# Altium PCB ClockPCB.PcbDoc
Units mm, origin at the board's own origin, x right, y up, seen from the top; angles counter-clockwise.
Board outline 99.98 x 86.26 mm, 2 copper layers (Top Layer, Bottom Layer); 22 components, 75 nets, 198 pads, 0 vias.
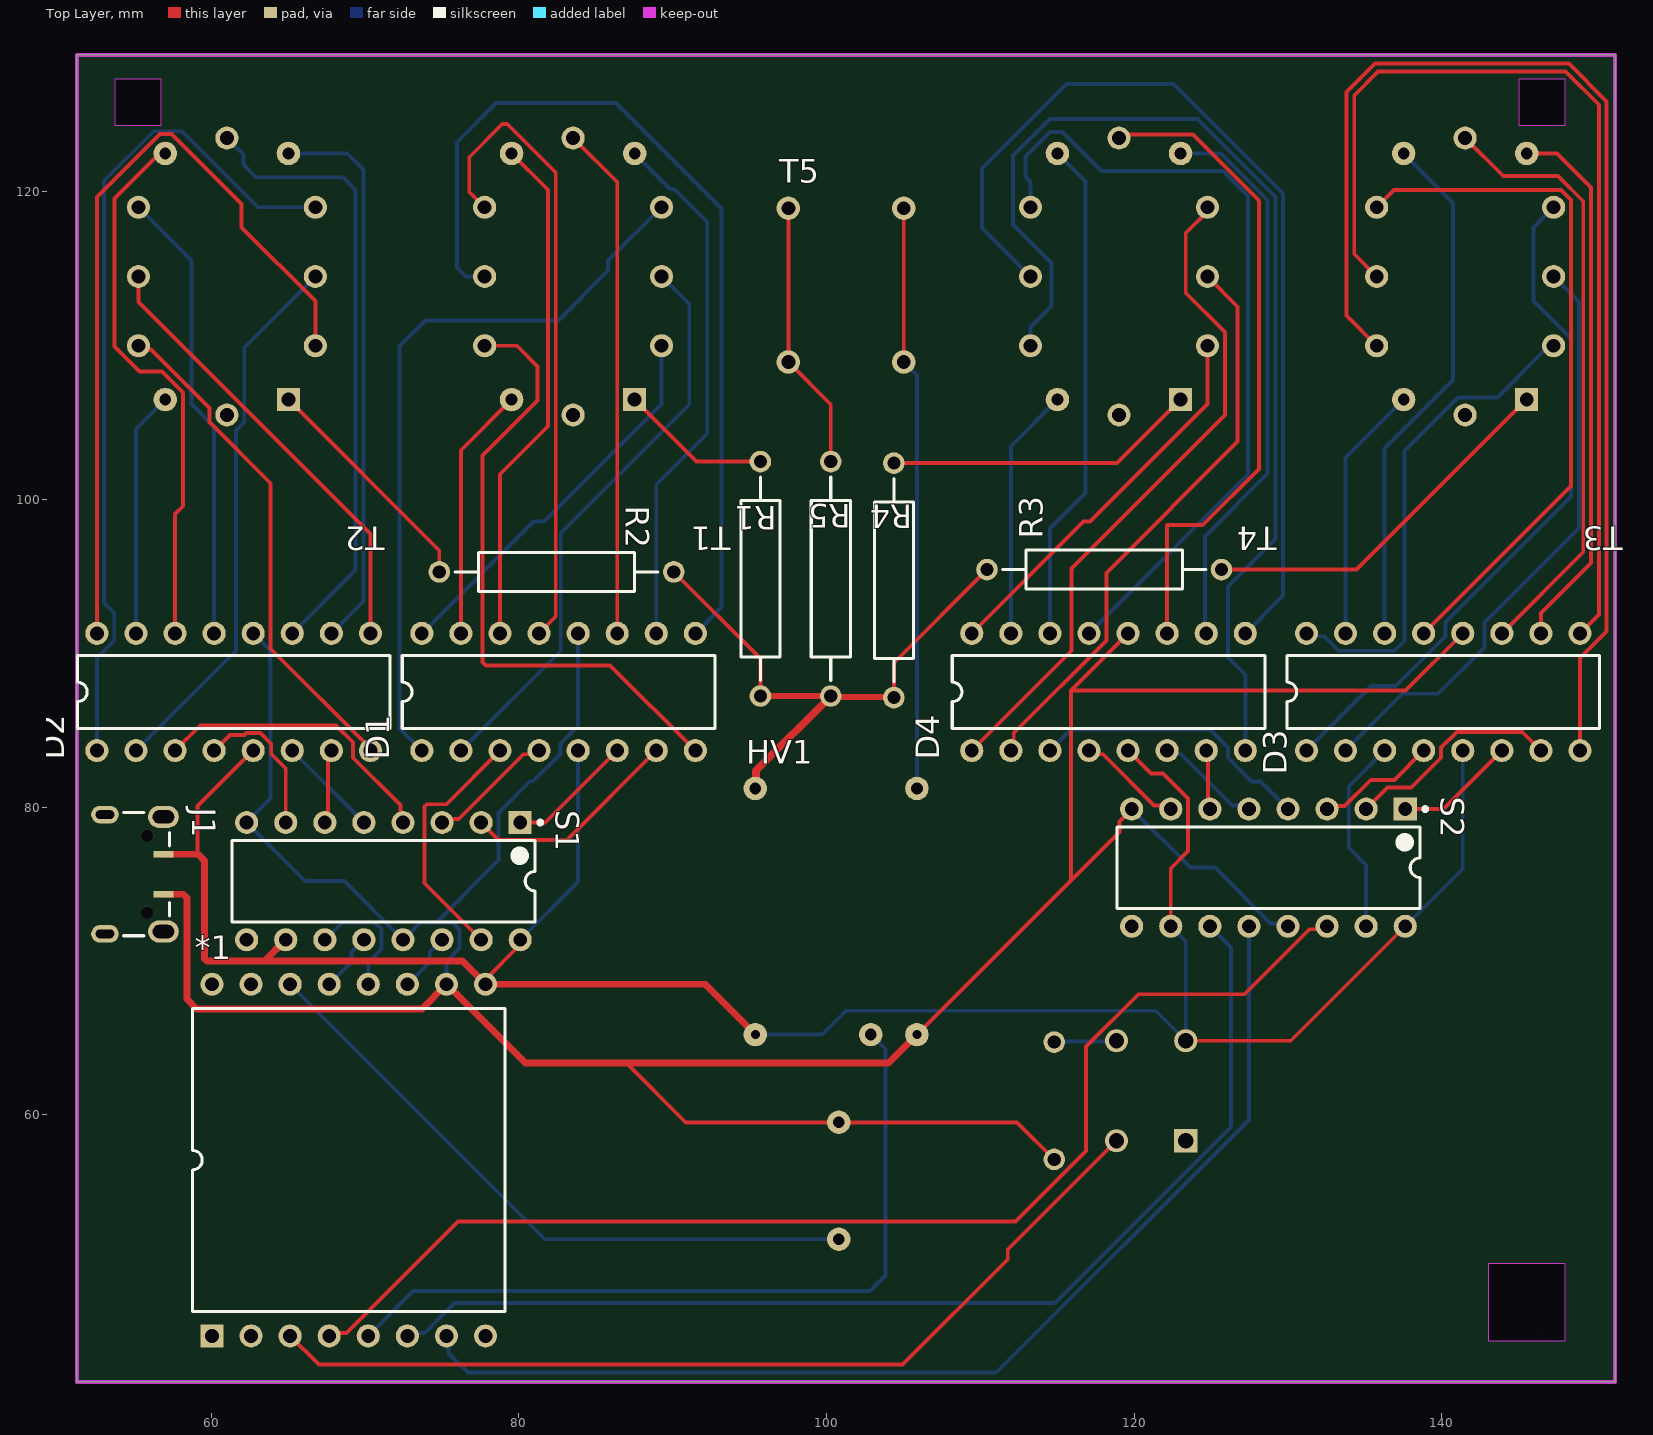
[diagram p0: Top Layer view]
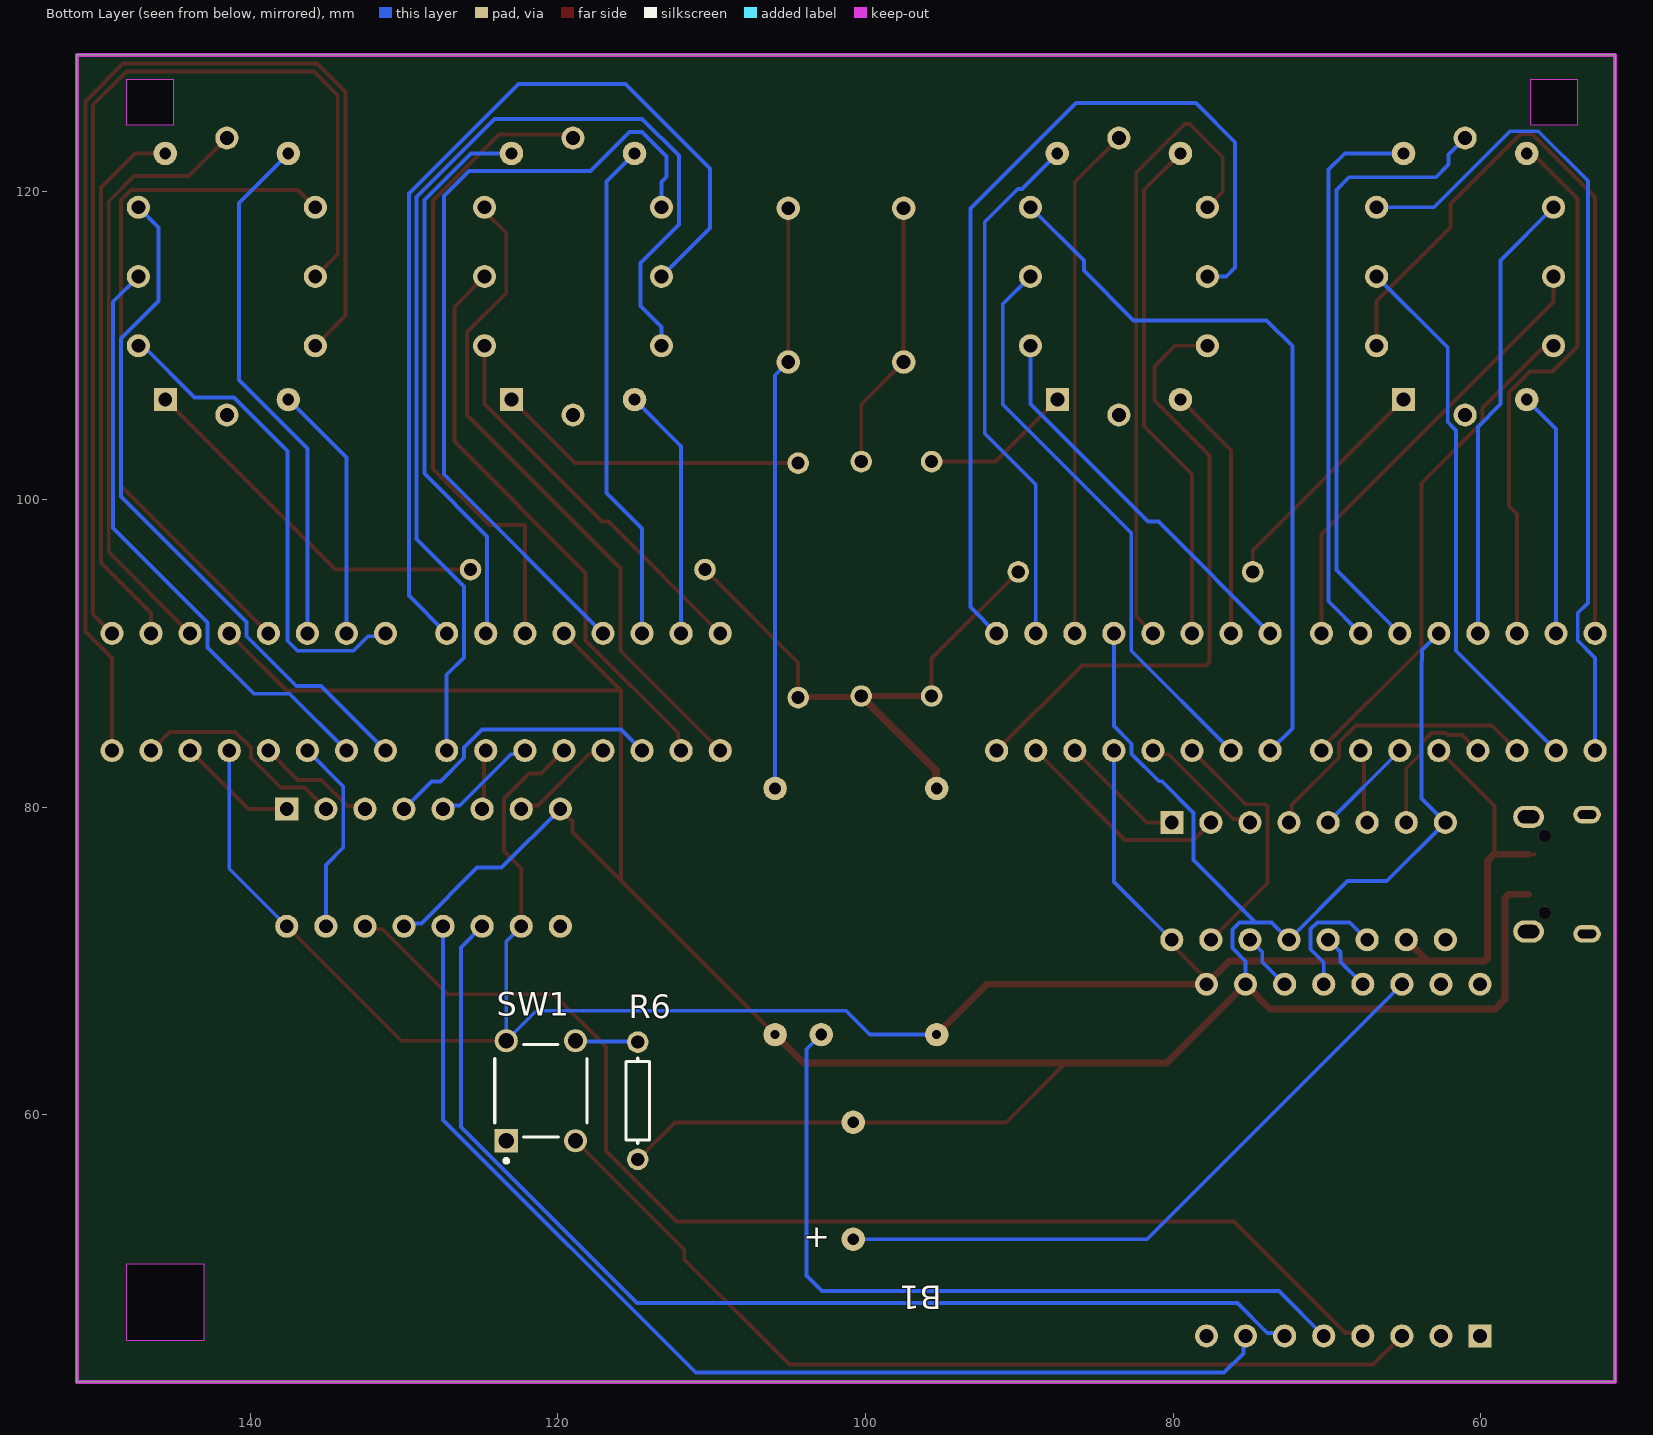
[diagram p1: Bottom Layer view, seen from below]
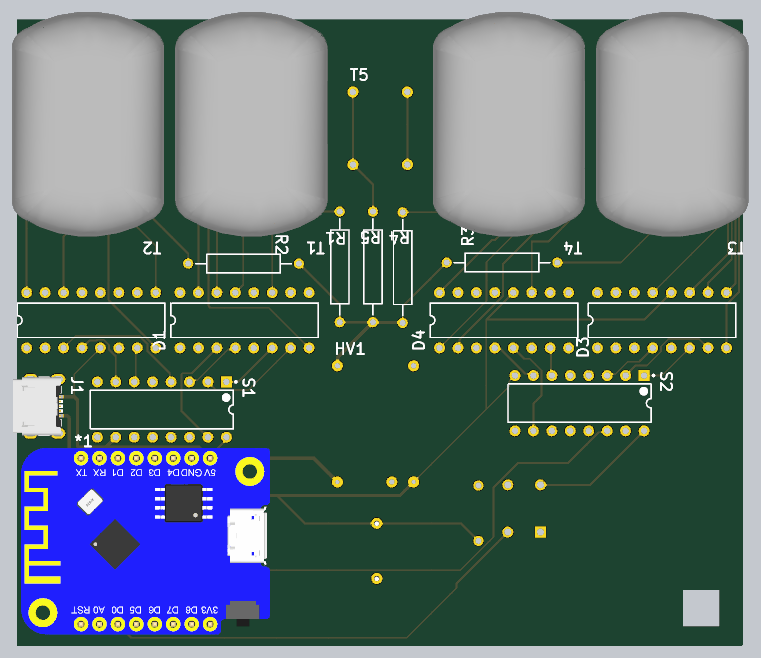
[diagram p2: 3D render of the assembled board from above, using the file's embedded part models]

## Layer stack, top to bottom
Top Solder: solder mask 0.0102, Solder Resist, Dk 3.5
Top Layer: signal copper 0.0356
Dielectric 1: dielectric 0.32, FR-4, Dk 4.8
Bottom Layer: signal copper 0.0356
Bottom Solder: solder mask 0.0102, Solder Resist, Dk 3.5

## Board outline
51.275,42.65 151.257,42.65 151.257,128.905 51.275,128.905
cut-out: 53.745,127.325 53.745,124.325 56.745,124.325 56.745,127.325
cut-out: 145,127.325 145,124.325 148,124.325 148,127.325
cut-out: 143,50.33 143,45.33 148,45.33 148,50.33
cut-out: 146.45,45.9
cut-out: 243.84,48.514

## Design rules (kind name [scope] priority, off if disabled: settings)
Clearance [All] p1: gap=0.254 ignorepadtopadclearanceinfootprint=TRUE except(0: Arc-Hole Track-Hole SMDPad-Hole THPad-Hole Via-Hole Fill-Hole Poly-Hole Region-Hole Text-Hole)
Height [All] p1: minheight=0 maxheight=100 prefheight=12.7
PolygonConnect [All] p1: connectstyle=Relief reliefconductorwidth=0.254 reliefentries=4 polygonreliefangle="90 Angle" airgapwidth=0.254
RoomDefinition Clock [InComponentClass('Clock')] p1: confinementstyle=ConfineIn formatcopy=TRUE lockcomponents=FALSE outline 48.375,42.6 152.35,42.6 152.35,130.492 48.375,130.492
RoutingVias [All] p1: holewidth=0.711 width=1.27 viastyle="Through Hole" minholewidth=0.711 minwidth=1.27 maxholewidth=0.711 maxwidth=1.27
SolderMaskExpansion [All] p1: expansion=0.102
Width [All] p1: maxlimit=0.5 minlimit=0.254 preferedwidth=0.254
29 further rules are at their usual default settings.

## Components (designator, comment, footprint, x,y, rotation, side; value= is the part's Value field where it differs from the comment)
*1 "D1Mini" DIP16-WemosD1Mini 60.055,45.64 r90 top
B1 "Buzzer" Buzzer 100.8,51.925 r0 bottom
D1 "K155ID1" DIP16 73.695,83.686 r90 top
D2 "K155ID1" DIP16 52.575,83.686 r90 top
D3 "K155ID1" DIP16 131.195,83.686 r90 top
D4 "K155ID1" DIP16 109.44,83.686 r90 top
HV1 "5V to 170V stepup" "5V to 170V stepup" 95.375,65.225 r90 top
J1 "629105150521" 629105150521 54,75.65 r270 top
R1 "Res2" AXIAL-0.6 95.7,94.85 r270 top value=18K
R2 "Res2" AXIAL-0.6 82.45,95.3 r0 top value=18K
R3 "Res2" AXIAL-0.6 118.05,95.45 r180 top value=18K
R4 "Res2" AXIAL-0.6 104.375,94.75 r270 top value=18K
R5 "Res2" AXIAL-0.6 100.275,94.85 r270 top value=18K
R6 "Res1" AXIAL-0.3 114.8,60.925 r90 bottom value=15K
S1 "SN74HC595N" N0016A 71.2,75.2 r270 top
S2 "SN74HC595N" N0016A 128.725,76.075 r270 top
SW1 "1825910-6" TECO-1825910-6_V 121.1,61.575 r90 bottom
T1 "IN-12A" IN-12A 89.279,110 r180 top
T2 "IN-12A" IN-12A 66.775,110 r180 top
T3 "IN-12A" IN-12A 147.26,110 r180 top
T4 "IN-12A" IN-12A 124.76,110 r180 top
T5 "NixieColon" "COLON IN-12A" 97.519,118.94 r0 top

## Footprints (in the part's own frame and the unit in brackets; to place one, negate y for a bottom-side part, rotate by r counter-clockwise, add the part's x,y. Pads: shape width x height; smd on the part's side, far side on the other; paste and mask are expansions set on the pad)
"5V to 170V stepup" [mil]
  round 60 hole 23.62: 5V+(0,0) 5V-(0,-413.39)
  round 60 hole 30: 170V(629.92,0) HVG(629.92,-413.39) SHDN(0,-295.28)
  body extent -49,-472 709,69, height 79
629105150521 [mm] "Micro USB 2.0 SMT Type B Horizontal 5 Contacts High Current"
  rect 0.45x1.3 smd: 1(-1.3,2.9) 5(1.3,2.9)
  rect 0.45x1.3 on Top Overlay: 2(-0.65,2.9) 3(0,2.9) 4(0.65,2.9)
  round 0.8 hole 0.8 unplated: MH1(-2.5,1.85) MH2(2.5,1.85)
  oval 1.15x1.8 hole 0.55 slot 1.2 at 90 deg: Shell(-3.875,-0.9) Shell(3.875,-0.9)
  oval 1.45x2 hole 0.85 slot 1.4 at 90 deg: Shell(-3.725,2.9) Shell(3.725,2.9)
  silkscreen extent -4,0.3 4,3.3, body extent -4,-3.3 4,3.3, height 2.75
AXIAL-0.3 [mm] "Axial Device, Thru-Hole; 2 Leads; 0.3 in Pin Spacing"
  round 1.4 hole 0.85: 1(-3.81,0) 2(3.81,0)
  silkscreen extent -2.77,-0.76 2.77,0.76
AXIAL-0.6 [mm] "Axial Device, Thru-Hole; 2 Leads; 0.6 in Pin Spacing"
  round 1.4 hole 0.85: 1(-7.62,0) 2(7.62,0)
  silkscreen extent -6.6,-1.27 6.6,1.27
Buzzer [mil]
  round 60 hole 30: GND(0,-299.21) VCC(0,0)
  body extent -236,-384 236,89, height 492
"COLON IN-12A" [mm]
  round 1.524 hole 0.9: 170V(0,-10) 170V(0,0) DOT(7.5,-10) DOT(7.5,0)
  Top Layer lines w0.254: 0,-10 0,0 ; 7.5,-10 7.5,0
DIP16 [mm]
  round 1.5 hole 0.9: 0(7.62,0) 1(7.62,-2.54) 2(0,-17.78) 3(7.62,-17.78) 4(7.62,-7.62) 5(7.62,-5.08) 6(7.62,-12.7) 7(7.62,-15.24) 8(0,0) 9(0,-2.54) A(0,-5.08) B(0,-12.7) C(0,-15.24) D(0,-7.62) GND(7.62,-10.16) VCC(0,-10.16)
  silkscreen extent 1.43,-19.05 6.19,1.27, body extent -0.18,-18.96 14.5,1, height 10.5
DIP16-WemosD1Mini [mm]
  round 1.5 hole 0.9: 3V3(0,-17.78) A0(0,-2.54) D0(0,-5.08) D1(22.86,-5.08) D2(22.86,-7.62) D3(22.86,-10.16) D4(22.86,-12.7) D5(0,-7.62) D6(0,-10.16) D7(0,-12.7) D8(0,-15.24) GND(22.86,-15.24) RX(22.86,-2.54) TX(22.86,0) VCC(22.86,-17.78)
  rect 1.5x1.5 hole 0.9: RST(0,0)
  silkscreen extent 1.58,-19.05 21.28,1.27, body extent -1.42,-26 24.28,8.25, height 10.47
IN-12A [mm]
  round 1.5 hole 0.9: 0(0,0) 2(11.5,0) 3(11.5,-4.5) 4(11.5,-9) 6(5.75,-13.5) 8(0,-9) 9(0,-4.5) N12(5.75,4.5)
  round 1.524 hole 0.762: 1(9.75,3.5) 5(9.75,-12.5) 7(1.75,-12.5)
  rect 1.5x1.5 hole 0.9: 170V(1.75,3.5)
  body extent -4.75,-20 16.25,11, height 34
N0016A [mm] "DIP, 16-Leads, Body 19.7x6.6mm, Pitch 2.54mm"
  rect 1.5x1.5 hole 0.9: 1(-3.81,8.89)
  round 1.5 hole 0.9: 2(-3.81,6.35) 3(-3.81,3.81) 4(-3.81,1.27) 5(-3.81,-1.27) 6(-3.81,-3.81) 7(-3.81,-6.35) 8(-3.81,-8.89) 9(3.81,-8.89) 10(3.81,-6.35) 11(3.81,-3.81) 12(3.81,-1.27) 13(3.81,1.27) 14(3.81,3.81) 15(3.81,6.35) 16(3.81,8.89)
  silkscreen extent -3.93,-9.85 2.65,10.32, body extent -3.95,-9.85 3.95,9.85, height 5.08
TECO-1825910-6_V [mm] "Switch, 4-Leads, Body 5.99x5.99mm"
  rect 1.5x1.5 hole 0.99: 1(-3.25,2.25)
  round 1.5 hole 0.99: 2(3.25,2.25) 3(-3.25,-2.25) 4(3.25,-2.25)
  silkscreen extent -4.67,-2.99 2.99,3, body extent -3,-2.99 2.99,3, height 5

## Part data
J1: library part CMP-1502-03252-1, "Micro USB 2.0 Type B Receptacle WR-COM, Horizontal, SMT, with Pegs, High Current at Pin 1 & Pin 5", Contact Resistance=30mOhm, Manufacturer="Wurth Elektronik", Operating Temperature=-40to85degC, Rated Current=3A, Working Voltage=30VAC, Connector Type=MicroUSB2.0TypeB, Datasheet URL=https://katalog.we-online.de/em/datasheet/629105150521.pdf, Gender=Receptacle, Manufacturer URL=http://www.we-online.de, Mounting Technology=SMT, Orientation=Horizontal, Package Reference=629105150521, Packaging=TapeandReel, Part Number=629105150521, Publisher=WurthElektronik
R1 R2 R3 R4 R5 R6: "Resistor", LatestRevisionDate=17-Jul-2002, LatestRevisionNote="Re-released for DXP Platform.", Published=8-Jun-2000, Publisher="Altium Limited"
  R1 R2 R3 R4 R5: PackageDescription="Axial Device, Thru-Hole; 2 Leads; 0.4 in Pin Spacing", PackageReference=AXIAL-0.4
  R6: PackageDescription="Axial Device, Thru-Hole; 2 Leads; 0.3 in Pin Spacing", PackageReference=AXIAL-0.3
S1 S2: library part CMP-0780-00137-3, "8-Bit Shift Registers With 3-State Output Registers, N0016A, TUBE", F @ Nom Voltage(Max)(Mhz)=28, Generic Part Number=SN74HC595, ICC @ Nom Voltage(Max)(mA)=0.08, Manufacturer="Texas Instruments", Operating Temperature Range(C)="-40 to 85", Rating=Military, tpd @ Nom Voltage(Max)(ns)=34, Voltage(Nom)(V)=6, 3-State Output=Yes, Bits=8, Code_JEDEC=MS-001, DatasheetVersion=SCLS041H, Input Type=CMOS, Output Drive (IOL/IOH)(Max)(mA)=7.8/-7.8, Output Type=CMOS, PackageReference=N0016A, PackageVersion=http://www.ti.com/lit/ml/mpdi002c/mpdi002c.pdf, Technology Family=HC, VCC(Max)(V)=6, VCC(Min)(V)=2
SW1: library part CMP-1684-00021-1, "Tact Switch, SPST-NO, 0.05 A, -35 to 85 degC, 4-Pin THD, RoHS, Bulk", Actuator Color=Black, Contact Rating @ Voltage=0.05A@24VDC, Dielectric Strength=500VAC, Manufacturer="TE Connectivity", Maximum AC Voltage Rating=N/A, Maximum Contact Resistance=100mOhm, Maximum DC Voltage Rating=24V, Minimum Insulation Resistance=100MOhm, Operating Temperature=-35to85C, Package Description="4-Pin Through Hole Device, Body 5.99 x 5.99 mm, Pitch 6.5 mm", Package Reference=THD, Actuator Length=1.4mm, Actuator Material=PolybutyleneTerephthalate, Actuator Style=RoundButton, Base Material=N/A, Body Orientation=Straight, Bushing Type=Unthreaded, Contact Material=CopperAlloy, Contact Plating=Silver, Datasheet URL=http://www.te.com/commerce/DocumentDelivery/DDEController?Action=showdoc&DocId=Customer+Drawing%7F1825910%7FC9%7Fpdf%7FEnglish%7FENG_CD_1825910_C9.pdf%7F1825910-6, Datasheet Version="Rev. C9", Dimension=5.99x5mm, Electrical Life=100000Cycles, Family=1825910, Function=MomentaryContact, Housing Material=N/A, Illumination=N/R, Manufacturer URL=http://www.te.com, Mechanical Life=100000Cycles, Mounting=ThroughHole, Packaging=N/A, Part No=1825910-6, Pole Throw Configuration=SPST, Product Weight=N/A, RoHS=Yes, Seal Description=N/A, Seal Location=N/A, Switch Configuration=OFF(ON), Terminal Type=PCPins, Thread Size=N/R

## Nets (pads, with @x,y where several pads share a name; then routed paths per layer and width w, separated by ;. In a path a pad name is that pad's centre, name@x,y a point inside that pad or via, vN(x,y) a via of type N, cw(c..) or ccw(c..) an arc to the next point about the centre after c; other vN are vias at no path point)
Net*1_D0: *1.D0 SW1.3 | length 60.9
  Top Layer w0.254: *1.D0 67,43.775 104.95,43.775 111.781,50.606 111.781,51.256 SW1.3
Net*1_D1: *1.D1 B1.VCC | length 42.5
  Bottom Layer w0.254: *1.D1 81.71,51.925 B1.VCC
Net*1_D2: *1.D2 S1.12 | length 3.8
  Bottom Layer w0.254: *1.D2 69.13,69.955 69.13,70.59 S1.12
Net*1_D3: *1.D3 S1.11 | length 8.3
  Bottom Layer w0.254: S1.11 68.521,72.521 70.621,72.521 71.061,72.081 71.061,70.771 70.215,69.925 *1.D3
Net*1_D4: *1.D4 S1.14 | length 3.8
  Bottom Layer w0.254: *1.D4 74.21,69.955 74.21,70.59 S1.14
Net*1_D5: *1.D5 S2.14 | length 79.9
  Top Layer w0.254: *1.D5 67.865,45.83 68.806,45.83 76.044,53.068 112.282,53.068 116.875,57.661 116.875,64.449 120.276,67.85 127.179,67.85 131.404,72.075 132.345,72.075 S2.14
Net*1_D6: *1.D6 HV1.SHDN | length 51.3
  Bottom Layer w0.254: *1.D6 73.125,48.55 102.824,48.55 103.799,49.525 103.825,49.525 103.825,64.275 HV1.SHDN
Net*1_D7: *1.D7 S2.11 | length 72.8
  Bottom Layer w0.254: *1.D7 72.945,45.83 73.886,45.83 75.831,47.775 114.839,47.775 126.291,59.227 126.291,70.889 S2.11
Net*1_D8: *1.D8 S2.12 | length 73.1
  Bottom Layer w0.254: *1.D8 75.441,45.494 75.441,44.509 76.7,43.25 111.032,43.25 127.455,59.673 S2.12
Net*1_GND: *1.GND B1.GND D1.GND D2.GND D3.GND D4.GND HV1.5V- J1.5 R6.1 S1.8 S1.13 S2.8 S2.13 | length 225.9
  Top Layer w0.254: 87,63.375 90.85,59.525 B1.GND 112.39,59.525 R6.1 ; HV1.5V- 115.887,75.238 ; D4.GND 115.887,87.593 ; S2.8 119.035,79.085 119.035,78.385 115.887,75.238 ; D3.GND 137.643,87.593 115.887,87.593 ; 115.887,75.238 115.887,87.593
  Top Layer w0.45: J1.5 58.175,74.35 58.425,74.1 58.425,67.525 59.05,66.9 73.695,66.9 *1.GND 80.42,63.375 87,63.375 104.025,63.375 HV1.5V-
  Bottom Layer w0.254: D2.GND 63.825,90.216 63.825,89.55 63.866,89.509 63.866,80.566 S1.8 66.12,75.2 68.66,75.2 S1.13 73.601,72.521 74.64,72.521 ; *1.GND 75.295,69.995 76.141,70.841 76.141,72.059 75.679,72.521 74.64,72.521 ; D1.GND 83.855,85.285 82.7,84.13 82.7,83.471 80.923,81.695 80.736,81.695 78.681,79.64 78.681,76.562 74.64,72.521 ; S2.8 123.645,76.075 125.244,76.075 128.864,72.455 129.805,72.455 S2.13
Net*1_VCC: *1.VCC D1.VCC D2.VCC D3.VCC D4.VCC HV1.5V+ J1.1 S1.10 S1.16 S2.10 S2.16 SW1.2 | length 156.6
  Top Layer w0.254: J1.1@56.55,76.975 J1.1@56.594,76.931 ; 59.125,76.975 59.125,80.076 D2.VCC ; 59.575,70.149 59.724,70 ; *1.VCC 77.835,68.817 80.09,71.072 S1.16 ; D4.VCC 121.087,82.199 121.876,82.199 123.506,80.569 123.506,77.151 122.375,76.02 S2.10 ; SW1.2 130.175,64.825 S2.16
  Top Layer w0.45: J1.1 59.15,76.95 ; 59.125,76.975 59.15,76.95 ; 59.575,70.149 59.575,76.525 59.15,76.95 ; 59.724,70 63.46,70 ; S1.10 63.46,70 ; HV1.5V+ 92.1,68.5 *1.VCC 76.335,70 63.46,70
  Bottom Layer w0.254: S1.16 83.855,75.155 D1.VCC ; HV1.5V+ 99.722,65.225 101.272,66.775 121.4,66.775 SW1.2 123.35,71.29 S2.10 ; S2.16 141.355,76.005 D3.VCC
NetD1_0: D1.0 T1.0 | length 25.5
  Bottom Layer w0.254: D1.0 80.957,98.568 81.636,98.568 89.279,106.211 T1.0
NetD1_1: D1.1 T1.1 | length 16.6
  Top Layer w0.254: D1.1 76.235,103.206 T1.1
NetD1_2: D1.2 T1.2 | length 40.9
  Top Layer w0.254: T1.2 79.875,110 81.22,108.655 81.22,106.445 77.644,102.869 77.644,89.455 77.874,89.225 85.936,89.225 D1.2
NetD1_3: D1.3 T1.3 | length 59.6
  Bottom Layer w0.254: T1.3 76.549,114.5 75.975,115.074 75.975,123.225 78.525,125.775 86.325,125.775 93.175,118.925 93.175,93.006 D1.3
NetD1_4: D1.4 T1.4 | length 41.9
  Top Layer w0.254: T1.4 76.775,120.004 76.775,122.25 78.925,124.4 79.245,124.4 82.398,121.247 82.398,92.389 D1.4
NetD1_5: D1.5 T1.5 | length 33.5
  Top Layer w0.254: D1.5 78.775,101.65 81.89,104.765 81.89,120.139 T1.5
NetD1_6: D1.6 T1.6 | length 33.4
  Top Layer w0.254: T1.6 86.395,120.634 D1.6
NetD1_7: D1.7 T1.7 | length 34.7
  Bottom Layer w0.254: T1.7 89.829,120.2 90.1,120.2 92.25,118.05 92.25,104.296 88.935,100.981 D1.7
NetD1_8: D1.8 T1.8 | length 48
  Bottom Layer w0.254: D1.8 72.25,85.131 72.25,109.975 73.925,111.65 82.575,111.65 85.808,114.883 85.808,115.529 T1.8
NetD1_9: D1.9 T1.9 | length 37.7
  Bottom Layer w0.254: D1.9 82.724,90.175 82.724,97.824 91.075,106.175 91.075,112.704 T1.9
NetD1_A: D1.A S1.15 | length 16.6
  Top Layer w0.254: S1.15 73.879,75.061 73.879,80.051 74.028,80.2 75.289,80.2 D1.A
NetD1_B: D1.B S1.1 | length 8.2
  Top Layer w0.254: S1.1 81.719,79.01 D1.B
NetD1_C: D1.C S1.2 | length 14.3
  Top Layer w0.254: S1.2 78.681,77.879 83.128,77.879 D1.C
NetD1_D: D1.D S1.3 | length 8.2
  Top Layer w0.254: S1.3 75.248,79.248 76.094,79.248 80.293,83.447 81.077,83.447 D1.D
NetD2_0: D2.0 T2.0 | length 53.1
  Top Layer w0.254: D2.0@52.765,91.115 D2.0 52.575,119.666 56.684,123.775 57.425,123.775 61.981,119.219 61.981,117.695 66.775,112.901 T2.0 T2.0@66.486,110
NetD2_1: D2.1 T2.1 | length 16
  Bottom Layer w0.254: D2.1 55.115,104.59 T2.1
NetD2_2: D2.2 T2.2 | length 32.9
  Top Layer w0.254: T2.2 55.513,109.762 56.098,109.762 59.894,105.966 59.894,105.032 63.866,101.06 63.866,90.302 70.355,83.813 D2.2
NetD2_3: D2.3 T2.3 | length 29.4
  Top Layer w0.254: T2.3 55.275,112.849 70.355,97.769 D2.3
NetD2_4: D2.4 T2.4 | length 29.7
  Bottom Layer w0.254: T2.4 58.725,115.55 58.725,106.201 60.195,104.731 D2.4
NetD2_5: D2.5 T2.5 | length 35.7
  Top Layer w0.254: T2.5 56.65,122.5 53.725,119.575 53.725,109.951 55.351,108.325 56.816,108.325 58.168,106.973 58.168,99.565 57.655,99.052 D2.5
NetD2_6: D2.6 T2.6 | length 40.7
  Bottom Layer w0.254: T2.6 62.094,122.431 62.094,121.781 62.925,120.95 68.575,120.95 69.392,120.133 69.392,95.423 D2.6
NetD2_7: D2.7 T2.7 | length 36.3
  Bottom Layer w0.254: T2.7 68.85,122.5 69.9,121.45 69.9,93.391 D2.7
NetD2_8: D2.8 T2.8 | length 55
  Bottom Layer w0.254: D2.8 52.575,89.706 53.706,90.837 53.706,92.619 53.05,93.275 53.05,120.725 56.269,123.944 58.106,123.944 63.05,119 T2.8 T2.8@66.7,119.075
NetD2_9: D2.9 T2.9 | length 35.6
  Bottom Layer w0.254: D2.9 61.604,90.175 61.604,104.48 62.156,105.032 62.156,109.881 T2.9
NetD2_A: D2.A S1.4 | length 19.3
  Top Layer w0.254: D2.A 59.294,85.325 68.125,85.325 69.224,84.226 69.224,83.217 72.3,80.141 72.3,79.18 S1.4
NetD2_B: D2.B S1.5 | length 6.6
  Bottom Layer w0.254: D2.B 65.275,83.675 69.93,79.02 S1.5
NetD2_C: D2.C S1.6 | length 4.9
  Top Layer w0.254: S1.6 67.603,79.223 67.603,83.473 D2.C
NetD2_D: D2.D S1.7 | length 10
  Top Layer w0.254: D2.D 61.218,84.709 62.158,84.709 62.267,84.817 63.203,84.817 63.908,84.113 63.908,83.454 64.85,82.511 S1.7
NetD3_0: D3.0 T3.0 | length 32
  Bottom Layer w0.254: D3.0 131.385,91.115 132.326,91.115 133.267,90.175 136.925,90.175 137.575,90.825 137.575,103.164 141.042,106.631 143.602,106.631 146.971,110 T3.0
NetD3_1: D3.1 T3.1 | length 16.8
  Bottom Layer w0.254: D3.1 133.735,102.725 T3.1
NetD3_2: D3.2 T3.2 | length 78.9
  Top Layer w0.254: T3.2 133.792,111.968 133.792,126.485 135.64,128.333 148.249,128.333 150.708,125.874 150.708,91.439 148.975,89.706 D3.2
NetD3_3: D3.3 T3.3 | length 64.7
  Top Layer w0.254: T3.3 134.3,115.96 134.3,126.275 135.85,127.825 148.039,127.825 150.2,125.664 150.2,92.531 D3.3
NetD3_4: D3.4 T3.4 | length 45.5
  Top Layer w0.254: T3.4 136.891,120.131 147.728,120.131 148.391,119.468 148.391,100.882 D3.4
NetD3_5: D3.5 T3.5 | length 34.4
  Bottom Layer w0.254: D3.5 136.275,103.325 140.725,107.775 140.725,119.285 T3.5
NetD3_6: D3.6 T3.6 | length 39.7
  Top Layer w0.254: T3.6 143.985,121.025 147.553,121.025 149.184,119.394 149.184,96.595 D3.6
NetD3_7: D3.7 T3.7 | length 35.4
  Top Layer w0.254: T3.7 147.475,122.5 149.692,120.283 149.692,95.875 146.435,92.618 D3.7
NetD3_8: D3.8 T3.8 | length 44.9
  Bottom Layer w0.254: D3.8 135.398,87.889 136.997,87.889 140.224,91.115 140.224,92.032 148.391,100.199 148.391,110.468 145.95,112.909 145.95,117.69 T3.8
NetD3_9: D3.9 T3.9 | length 39.1
  Bottom Layer w0.254: D3.9 137.43,87.381 139.748,87.381 142.764,90.397 142.764,92.014 148.899,98.149 148.899,112.861 T3.9
NetD3_A: D3.A S2.15 | length 12.9
  Bottom Layer w0.254: S2.15 135.075,76.244 133.944,77.375 133.944,81.355 D3.A
NetD3_B: D3.B S2.1 | length 7.9
  Top Layer w0.254: S2.1 140.094,79.885 D3.B
NetD3_C: D3.C S2.2 | length 14.3
  Top Layer w0.254: S2.2 136.467,81.277 138.006,81.277 139.946,83.217 139.946,83.876 140.97,84.9 145.221,84.9 D3.C
NetD3_D: D3.D S2.3 | length 7.9
  Top Layer w0.254: S2.3 132.725,80.075 133.666,80.075 135.376,81.785 136.915,81.785 D3.D
NetD4_0: D4.0 T4.0 | length 25.4
  Top Layer w0.254: D4.0 116.702,98.568 117.117,98.568 124.76,106.211 T4.0
  Bottom Layer w0.254: D4.0@109.349,91.397 D4.0
NetD4_1: D4.1 T4.1 | length 16.4
  Bottom Layer w0.254: D4.1 111.98,103.47 T4.1
NetD4_2: D4.2 T4.2 | length 71.8
  Bottom Layer w0.254: T4.2 113.26,111.21 114.625,112.575 114.625,115.375 112.129,117.871 112.129,122.354 114.525,124.75 124.1,124.75 129.175,119.675 129.175,97.426 126.089,94.34 126.089,89.747 127.22,88.616 D4.2
NetD4_3: D4.3 T4.3 | length 62.8
  Bottom Layer w0.254: T4.3 110.1,117.66 110.1,121.525 115.6,127.025 122.543,127.025 129.683,119.885 129.683,93.769 D4.3
NetD4_4: D4.4 T4.4 | length 53
  Bottom Layer w0.254: T4.4 113.26,120.651 112.925,120.986 112.925,122.3 114.52,123.895 115.33,123.895 117.868,121.357 125.769,121.357 127.4,119.726 127.4,101.646 D4.4
NetD4_5: D4.5 T4.5 | length 32.9
  Bottom Layer w0.254: D4.5 114.52,98.119 116.825,100.424 116.825,120.685 T4.5
NetD4_6: D4.6 T4.6 | length 42.9
  Top Layer w0.254: T4.6 119.235,123.725 123.825,123.725 128.1,119.45 128.1,102 124.454,98.354 122.14,98.354 D4.6
NetD4_7: D4.7 T4.7 | length 36.8
  Bottom Layer w0.254: T4.7 125.632,122.5 128.667,119.465 128.667,101.692 124.589,97.614 124.589,91.397 D4.7
NetD4_8: D4.8 T4.8 | length 43.8
  Top Layer w0.254: D4.8 115.929,90.175 115.929,95.53 125.891,105.492 125.891,110.884 123.35,113.425 123.35,117.325 124.76,118.735 T4.8
NetD4_9: D4.9 T4.9 | length 37.7
  Top Layer w0.254: D4.9 112.17,83.876 112.17,84.817 118.191,90.837 118.191,95.241 126.725,103.775 126.725,112.535 T4.9
NetD4_A: D4.A S2.4 | length 18.6
  Bottom Layer w0.254: D4.A 115.884,85.05 124.915,85.05 126.089,83.876 126.089,83.217 127.636,81.67 128.21,81.67 S2.4
NetD4_B: D4.B S2.5 | length 6.9
  Bottom Layer w0.254: D4.B 122.378,83.447 123.047,83.447 126.371,80.123 127.217,80.123 S2.5
NetD4_C: D4.C S2.6 | length 3.9
  Top Layer w0.254: D4.C 124.797,83.568 124.797,80.003 S2.6
NetD4_D: D4.D S2.7 | length 6.9
  Top Layer w0.254: D4.D 117.298,83.447 117.967,83.447 121.291,80.123 122.137,80.123 S2.7
NetHV1_170V: HV1.170V R1.2 R2.2 R3.2 R4.2 R5.2 | length 38.2
  Top Layer w0.254: R2.2 95.7,89.67 R1.2 R1.2@95.538,87.068 ; HV1.170V HV1.170V@95.413,81.263 ; R5.2 R5.2@100.325,87.18 ; R4.2@104.325,87.18 R4.2 104.375,89.395 R3.2
  Top Layer w0.4: R1.2 R5.2 ; R5.2@100.325,87.18 R4.2@104.325,87.18
  Top Layer w0.5: HV1.170V@95.413,81.263 95.413,82.368 R5.2
NetHV1_HVG: HV1.HVG T5.DOT | length 28.1
  Bottom Layer w0.254: T5.DOT@105.019,108.94 105.875,108.084 HV1.HVG
NetR1_1: R1.1 T1.170V | length 9.8
  Top Layer w0.254: T1.170V 91.559,102.47 R1.1
NetR2_1: R2.1 T2.170V | length 15.3
  Top Layer w0.254: T2.170V 74.83,96.695 R2.1
NetR3_1: R3.1 T3.170V | length 24.4
  Top Layer w0.254: R3.1 134.46,95.45 T3.170V
NetR4_1: R4.1 T4.170V | length 20.3
  Top Layer w0.254: R4.1 118.88,102.37 T4.170V
NetR5_1: R5.1 T5.170V | length 7.6
  Top Layer w0.254: T5.170V@97.519,108.94 100.275,106.184 R5.1
NetR6_2: R6.2 SW1.4 | length 4.1
  Bottom Layer w0.254: R6.2 114.845,64.78 118.805,64.78 SW1.4
pads on no net: *1.3V3 *1.A0 *1.RST *1.RX *1.TX J1.2 J1.3 J1.4 J1.MH1 J1.MH2 J1.Shell S1.9 S2.9 SW1.1 T1.N12 T2.N12 T3.N12 T4.N12

## Polygon pours and split planes (outlines as drawn)
no net on Top Layer "Top Layer-No Net" (solid, pour order 0): 51.275,128.905

## Keep-outs
Keep-Out Layer:
  rectangle: 145,124.325 148,127.325
  rectangle: 143,45.33 148,50.33
  rectangle: 53.745,124.325 56.745,127.325
  lines w0.254: 51.275,42.65 151.257,42.65 151.257,128.905 51.275,128.905 51.275,42.65

## Dimensions
151.257,128.905 to 151.257,42.65 on Top Paste

## Text inside footprints (layer, text, board x,y; h text height)
B1: Bottom Overlay "+" at 102.3,52.675 h1.52 r180
J1: Mechanical 2 "PCB Edge" at 50.7,76.95 h0.41 r270